# Altium PCB design3.PcbDoc
Units mil, origin at the board's own origin, x right, y up, seen from the top; angles counter-clockwise.
Board outline 866.14 x 3937.01 mil, 2 copper layers (Top Layer, Bottom Layer); 63 components, 38 nets, 188 pads, 177 vias.
Unrouted connection lines stored in the file: 1.
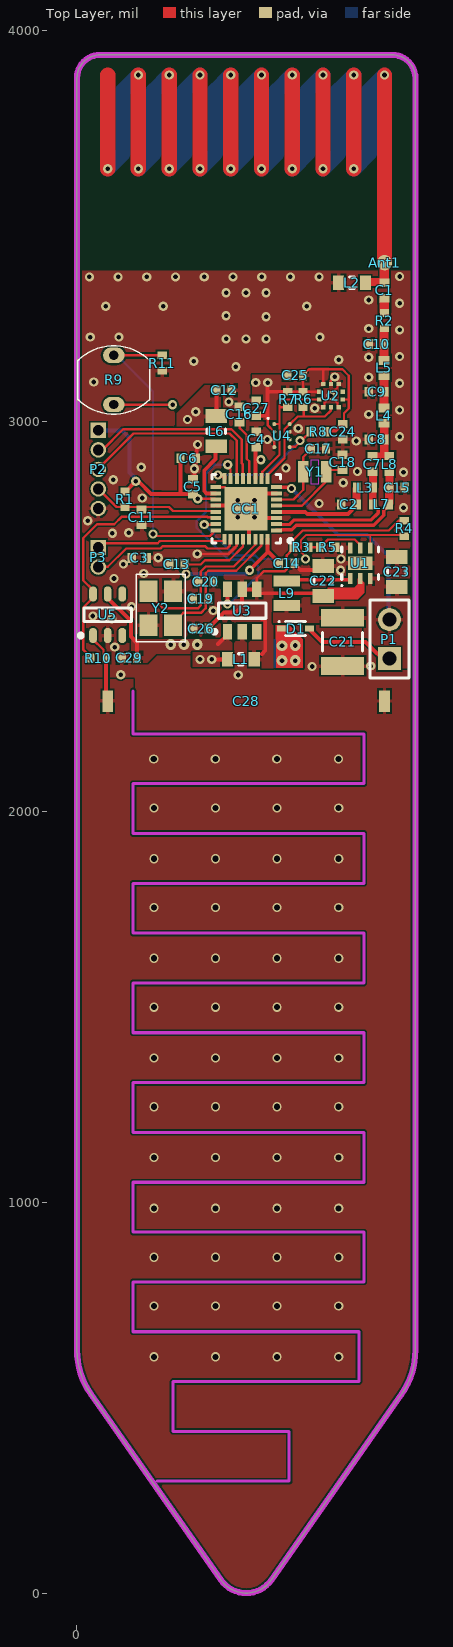
[diagram p0: Top Layer view]
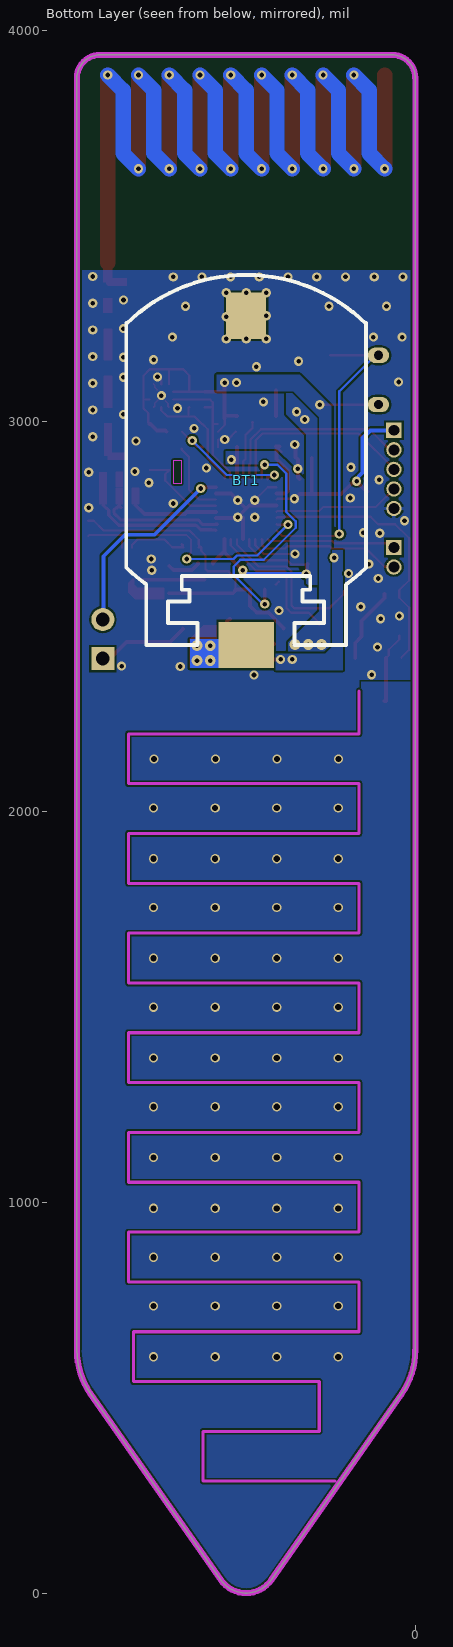
[diagram p1: Bottom Layer view, seen from below]
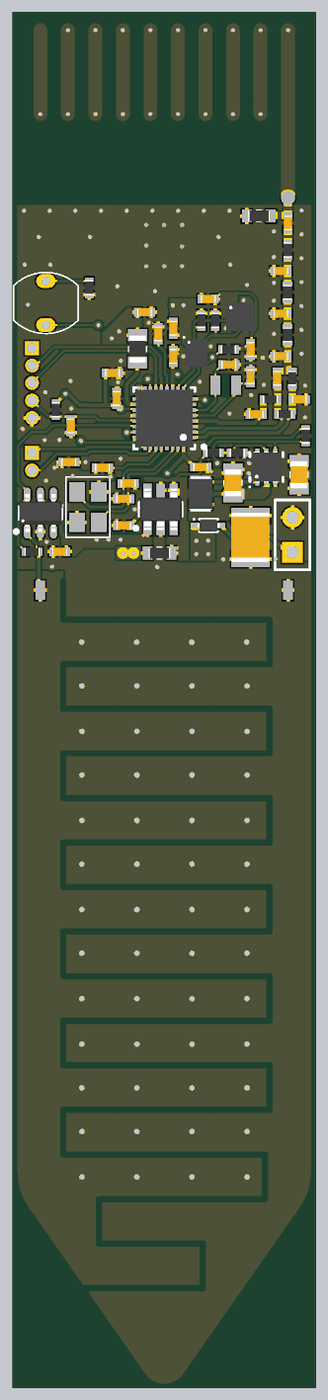
[diagram p2: 3D render of the assembled board from above, using the file's embedded part models]

## Layer stack, top to bottom
Top Solder: solder mask 0.4, Solder Resist, Dk 3.5
Top Layer: signal copper 1.4
Dielectric 1: dielectric 12.6, FR-4, Dk 4.8
Bottom Layer: signal copper 1.4
Bottom Solder: solder mask 0.4, Solder Resist, Dk 3.5

## Board outline
35.85,509.36 cw(c197.1,622.27) 0.25,622.27 0.25,3878.2 cw(c59.31,3878.2) 59.31,3937.26 807.34,3937.26 cw(c807.34,3878.2) 866.39,3878.2 866.39,622.27 cw(c669.54,622.27) 830.79,509.36 497.82,33.83 cw(c433.32,78.99) 368.82,33.83

## Design rules (kind name [scope] priority, off if disabled: settings)
Clearance [All] p1: gap=5 ignorepadtopadclearanceinfootprint=FALSE
DiffPairsRouting [All] p1: maxlimit=5 minlimit=5 mostfreqgap=5 toplayer_minwidth=8.58 toplayer_maxwidth=8.58 toplayer_prefwidth=8.58 bottomlayer_minwidth=8.58 bottomlayer_maxwidth=8.58 bottomlayer_prefwidth=8.58 maxuncoupledlength=500
Height Height_1 [InComponent('U2')] p1: minheight=0 maxheight=3937.01 prefheight=500
Height [All] p2: minheight=0 maxheight=1000 prefheight=500
HoleSize [All] p1: absolutevalues=TRUE maxlimit=100 minlimit=11.81 maxpercent=80.000 minpercent=20.000
MinimumSolderMaskSliver [All] p1: minsoldermaskwidth=5
PlaneClearance [All] p1: clearance=5
PlaneConnect [All] p1: planeconnectstyle=Direct reliefexpansion=20 reliefentries=4 reliefconductorwidth=10 reliefairgap=10
PolygonConnect [All] p1: thpad.connectstyle=Relief thpad.reliefconductorwidth=10 thpad.reliefentries=4 thpad.polygonreliefangle="90 Angle" thpad.airgapwidth=5 smdpad.connectstyle=Relief smdpad.reliefconductorwidth=10 smdpad.reliefentries=4 smdpad.polygonreliefangle="90 Angle" smdpad.airgapwidth=5 via.connectstyle=Direct via.reliefconductorwidth=10 via.reliefentries=4 via.polygonreliefangle="90 Angle" via.airgapwidth=10
RoutingVias [All] p1: holewidth=15.75 width=27.56 viastyle="Through Hole" minholewidth=11.81 minwidth=23.62 maxholewidth=19.68 maxwidth=31.5
SolderMaskExpansion [All] p1: expansion=5
Width Width_50ohm [InNet('NetAnt1_1')] p1: maxlimit=39.37 minlimit=11.55 preferedwidth=11.55 minimp=50.000000 maximp=50.000000 favimp=50.000000
Width [All] p2: maxlimit=10 minlimit=5 preferedwidth=6 minimp=50.000000 maximp=50.000000 favimp=50.000000
24 further rules are at their usual default settings.

## Classes and differential pairs
differential pair RF: +RF_P -RF_N

## Components (designator, comment, footprint, x,y, rotation, side; value= is the part's Value field where it differs from the comment)
Ant1 "Antenna 868 Helix" ANTENNA_868_HELIX 787.4,3405.51 r180 top
BT1 "Battery Coin Cell" S8421-45R 433,2488.19 r180 bottom
C1 "Cap" "0402 (CAP)" 787,3334.31 r90 top value=8.2pF
C2 "Cap" "0402 (CAP)" 696.37,2786.63 r0 top value=100pF
C3 "Cap" "0402 (CAP)" 160,2650 r0 top value=100nF
C4 "Cap" "0402 (CAP)" 459,2953 r270 top value=100nF
C5 "Cap" "0402 (CAP)" 297,2831.75 r270 top value=22uF
C6 "Cap" "0402 (CAP)" 285,2905 r180 top value=100nF
C7 "Cap" "0402 (CAP)" 756.37,2890.02 r90 top value=3.6pF
C8 "Cap" "0402 (CAP)" 767,2953 r180 top value=2.7pF
C9 "Cap" "0402 (CAP)" 767,3075 r180 top value=6.2pF
C10 "Cap" "0402 (CAP)" 767,3197 r180 top value=3pF
C11 "Cap" "0402 (CAP)" 165.67,2753.91 r270 top value=100nF
C12 "Cap" "0402 (CAP)" 377,3079 r180 top value=22uF
C13 "Cap" "0402 (CAP)" 256,2634 r0 top value=100nF
C14 "Cap" "0402 (CAP)" 537.2,2636 r180 top value=100nF
C15 "Cap" "0402 (CAP)" 819.37,2829.63 r0 top value=3.6pF
C16 "Cap" "0402 (CAP)" 416,3017 r270 top value=1uF
C17 "Cap" "0402 (CAP)" 618,2929 r180 top value=12pF
C18 "Cap" "0402 (CAP)" 680,2894.32 r270 top value=12pF
C19 "DNM" "0402 (CAP)" 317,2545 r0 top value=12pF
C20 "DNM" "0402 (CAP)" 330,2589 r180 top value=12pF
C21 "GRM32EC70J107ME15L" "1210 (CAP)" 680,2435 r90 top value=100uF
C22 "Cap" "0805 (CAP)" 630,2591 r270 top value=22uF
C23 "Cap" "0805 (CAP)" 819,2614 r270 top value=10uF
C24 "Cap" "0402 (CAP)" 680.39,2972.69 r90 top value=100nF
C25 "Cap" "0402 (CAP)" 558.97,3116.71 r0 top value=100nF
C26 "Cap" "0402 (CAP)" 317.66,2468.93 r0 top value=1uF
C27 "Cap" "0402 (CAP)" 459,3033 r270 top value=100nF
C28 "Chumidity" SOIL_CAP 433.07,669.29 r0 top locked value=1pF
C29 "Cap" "0402 (CAP)" 134.31,2394 r0 top value=100nF
CC1 "CC1310F32RSMR" CC1310F32RSMR 433.07,2775.59 r180 top
D1 "RB751S40T5G" SOD-523 560,2469 r0 top
L1 "BLM18HE152SN1D" "0603 (IND)" 419.63,2390 r180 top value="1500 Ohm"
L2 "Inductor" "0603 (IND)" 704,3354 r180 top value=68nH
L3 "Inductor" "0402 (IND)" 736.94,2829.63 r180 top value=7.5nH
L4 "Inductor" LQW15AN6N8G00D 786,3014 r270 top value=6.8nH
L5 "Inductor" LQW15AN6N8G00D 786,3136 r270 top value=6.8nH
L6 "MLZ2012N6R8LT000" "0805 (IND)" 357,2974 r90 top value=6.8uH
L7 "Inductor" "0402 (IND)" 778.37,2786.63 r0 top value=27nH
L8 "Inductor" "0402 (IND)" 799.37,2889.63 r270 top value=7.5nH
L9 "Inductor" SRN2009T 537.2,2559.35 r90 top value=3.3uH
P1 "Header 2" HDR1X2 800,2392 r90 top
P2 "Header 5" 5pin-1.27 54.96,2876.31 r270 top
P3 "Header 2" 2pin-1.27 54.96,2651.31 r270 top
R1 "Res1" "0402 (RES)" 123,2800 r90 top value=100K
R2 "DNM" "0402 (RES)" 787,3257 r270 top value=0
R3 "DNM" "0402 (RES)" 574,2677 r0 top value=0
R4 "Res1" "0402 (RES)" 837.87,2725.32 r270 top value=10K
R5 "DNM" "0402 (RES)" 642,2677 r0 top value=0
R6 "Res1" "0402 (RES)" 579,3055.32 r90 top value=4.7K
R7 "Res1" "0402 (RES)" 539.57,3055.32 r90 top value=4.7K
R8 "Res1" "0402 (RES)" 617.21,2972.69 r180 top value=4.7K
R9 "200K - 10K" Photoresistor 94.49,3105.29 r90 top
R10 "Rcharge" "0402 (RES)" 55.13,2393.55 r180 top value=1k
R11 "Res1" "0402 (RES)" 218.72,3148.6 r90 top value=4.7K
U1 "TPS61291" TPS61291 725.24,2636.13 r90 top
U2 "BMP388, Pressure sensor" BMP388 650.37,3065.16 r90 top
U3 "TPS22860" SOT23-5 423,2515 r90 top
U4 "HDC1010, Humidity, Temp" HDC1010 525,2962.84 r0 top
U5 "74LVC2G14, Inverting Schmitt Trigger" 74LVC2G14 78.74,2504.29 r90 top
Y1 "32.768 kHz" "FC-12M 32.7680KA-A3" 609,2870 r0 top
Y2 "TSX-3225 24.0000MF20G-AC3" "TSX-3225 24.0000MF20G-AC3" 214.68,2521.34 r90 top

## Footprints (in the part's own frame and the unit in brackets; to place one, negate y for a bottom-side part, rotate by r counter-clockwise, add the part's x,y. Pads: shape width x height; smd on the part's side, far side on the other; paste and mask are expansions set on the pad)
2pin-1.27 [mm]
  rect 1x1 hole 0.7: 1(-0.635,0)
  round 1 hole 0.7: 2(0.635,0)
5pin-1.27 [mm]
  rect 1x1 hole 0.7: 1(-2.54,0)
  round 1 hole 0.7: 2(-1.27,0) 3(0,0) 4(1.27,0) 5(2.54,0)
74LVC2G14 [mm] "TSOP, 6-Leads, Body 2,90x1,50mm, Pitch 0,95mm, IPC Medium Density"
  oval 1x0.5 smd: 1(-1.35,0.95) 2(-1.35,0) 3(-1.35,-0.95) 4(1.35,-0.95) 5(1.35,0) 6(1.35,0.95)
  silkscreen extent -1.47,-1.55 0.45,1.87, body extent -1.38,-1.55 1.38,1.55, height 1.1
"0402 (CAP)" [mm] "Chip Capacitor, 2-Leads, Body 1,60x0,80mm, IPC Medium Density"
  rect 0.54x0.64 smd: 1(-0.5,0) 2(0.5,0)
  body extent -0.55,-0.3 0.55,0.3, height 0.4
"0402 (IND)" [mm] "Chip Inductor, 2-Leads, Body 1,00x0,50mm, IPC Medium Density"
  rect 0.51x0.64 smd: 1(-0.525,0) 2(0.525,0)
  body extent -0.55,-0.3 0.55,0.3, height 0.4
"0402 (RES)" [mm] "Chip Resistor, 2-Leads, Body 1,00x0,50mm, IPC Medium Density"
  rect 0.5x0.6 smd: 1(-0.5,0) 2(0.5,0)
  body extent -0.55,-0.3 0.55,0.3, height 0.4
"0603 (IND)" [mm]
  rect 0.72x0.94 smd: 1(-0.87,0) 2(0.87,0)
  silkscreen extent -0.15,-0.37 0.15,0.37, body extent -0.8,-0.4 0.8,0.4, height 0.6
"0805 (CAP)" [mm] "Chip Capacitor, 2-Leads, Body 2,00x1,25mm, IPC Medium Density"
  rect 0.9x1.4 smd: 1(-0.975,0) 2(0.975,0)
  silkscreen extent -0.15,-0.6 0.15,0.6, body extent -1,-0.63 1,0.63, height 0.6
"0805 (IND)" [mm] "Chip Inductor, 2-Leads, Body 2,00x1,25mm, IPC Medium Density"
  rect 0.9x1.39 smd: 1(-0.98,0) 2(0.98,0)
  silkscreen extent -0.15,-0.6 0.15,0.6, body extent -1,-0.63 1,0.63, height 0.6
"1210 (CAP)" [mm] "Chip Capacitor, 2-Leads, Body 3,20x2,50mm, IPC Medium Density"
  rect 1.15x2.8 smd: 1(-1.575,0) 2(1.575,0)
  silkscreen extent -0.6,-1.3 0.6,1.3, body extent -1.8,-1.4 1.8,1.4, height 2.8
ANTENNA_868_HELIX [mm]
  round 1 smd: 1(0,0)
  Top Layer lines w1: 18,-6.1 18,-12.2 ; 16,-6.1 16,-12.2 ; 14,-6.1 14,-12.2 ; 12,-6.1 12,-12.2 ; 10,-6.1 10,-12.2 ; 8,-6.1 8,-12.2 ; 6,-6.1 6,-12.2 ; 4,-6.1 4,-12.2 ; 2,-6.1 2,-12.2 ; 0,0 0,-12.2
  Bottom Layer lines w1: 18,-6.1 17,-7.1 17,-11.2 16,-12.2 ; 16,-6.1 15,-7.1 15,-11.2 14,-12.2 ; 14,-6.1 13,-7.1 13,-11.2 12,-12.2 ; 12,-6.1 11,-7.1 11,-11.2 10,-12.2 ; 10,-6.1 9,-7.1 9,-11.2 8,-12.2 ; 8,-6.1 7,-7.1 7,-11.2 6,-12.2 ; 6,-6.1 5,-7.1 5,-11.2 4,-12.2 ; 4,-6.1 3,-7.1 3,-11.2 2,-12.2 ; 2,-6.1 1,-7.1 1,-11.2 0,-12.2
BMP388 [mm] "LGA, 10-Leads, Body 2,00x2,00mmx0,80mm, Pitch 0,50mm"
  rect 0.275x0.275 smd: 1(0.25,0.762) 2(-0.25,0.762) 3(-0.75,0.5) 4(-0.75,0) 5(-0.75,-0.5) 6(-0.25,-0.763) 7(0.25,-0.763) 8(0.75,-0.5) 9(0.75,0) 10(0.75,0.5)
  body extent -1.02,-1.03 1.65,1.02, height 30
CC1310F32RSMR [mm] "QFN, 32-Leads, Body 4,00x4,00mm, Pitch 0,40mm, Thermal Pad 2,80x2,80mm, IPC Medium Density"
  rect 0.7x0.26 smd: 1(-1.975,1.4) 2(-1.975,1) 3(-1.975,0.6) 4(-1.975,0.2) 5(-1.975,-0.2) 6(-1.975,-0.6) 7(-1.975,-1) 8(-1.975,-1.4) 17(1.975,-1.4) 18(1.975,-1) 19(1.975,-0.6) 20(1.975,-0.2) 21(1.975,0.2) 22(1.975,0.6) 23(1.975,1) 24(1.975,1.4)
  rect 0.26x0.7 smd: 9(-1.4,-1.975) 10(-1,-1.975) 11(-0.6,-1.975) 12(-0.2,-1.975) 13(0.2,-1.975) 14(0.6,-1.975) 15(1,-1.975) 16(1.4,-1.975) 25(1.4,1.975) 26(1,1.975) 27(0.6,1.975) 28(0.2,1.975) 29(-0.2,1.975) 30(-0.6,1.975) 31(-1,1.975) 32(-1.4,1.975)
  rect 2.8x2.8 smd: 33(0,0)
  silkscreen extent -3,-2.22 2.22,2.22, body extent -2.08,-2.08 2.08,2.08, height 1
"FC-12M 32.7680KA-A3" [mm]
  rect 0.7x1.4 smd: 1(-0.75,0) 2(0.75,0)
  Keep-Out Layer region: -0.254,-0.762 0.254,-0.762 0.254,0.762 -0.254,0.762
HDC1010 [mm] "BGA, 8-Leads, Body 1,59x2,04mmx0,68mm, Pitch 0,50mm"
  round 0.26 smd: A1(-0.5,0.75) A2(0.5,0.75) B1(-0.5,0.25) B2(0.5,0.25) C1(-0.5,-0.25) C2(0.5,-0.25) D1(-0.5,-0.75) D2(0.5,-0.75)
  silkscreen extent -0.95,1.08 -0.85,1.17, body extent -0.79,-1.02 0.79,1.02, height 0.67
HDR1X2 [mm] "Connector; Header; 2 Position"
  rect 1.5x1.5 hole 0.9: 1(0,0)
  round 1.5 hole 0.9: 2(2.54,0)
  silkscreen extent -1.27,-1.27 3.81,1.27
LQW15AN6N8G00D [mm] "Chip Inductor, 2-Leads, Body 1,00x0,60mm, IPC Medium Density"
  rect 0.58x0.74 smd: 1(-0.49,0) 2(0.49,0)
  body extent -0.55,-0.35 0.55,0.35, height 0.5
Photoresistor [mm]
  oval 1x1.4 hole 0.6: 1(-1.6,0) 2(1.6,0)
  silkscreen extent -2.22,-2.35 2.22,2.35
S8421-45R [mm]
  rect 3.6x3 smd: 1(0,-1.556)
  rect 2.6x3 smd: 2(0,19.844)
  silkscreen extent -7.8,-1.56 7.8,22.5
SOD-523 [mm] "Molded Diode, 2-Leads, Body 1,20x0,80mm, IPC Medium Density"
  rect 0.6x0.4 smd: 1(-0.9,0) 2(0.9,0)
  silkscreen extent -1.12,-0.45 0.65,0.5, body extent -0.87,-0.45 0.87,0.45, height 0.7
SOIL_CAP [mm]
  rect 0.7x1.4 smd: 1(-9,41) 2(9,41)
  Keep-Out Layer lines w0.2: -7.339,41.656 -7.339,38.867 7.661,38.867 7.661,35.628 -7.339,35.628 -7.339,32.389 7.661,32.389 7.661,29.15 -7.339,29.15 -7.339,25.911 7.661,25.911 7.661,22.672 -7.339,22.672 -7.339,19.434 7.661,19.434 7.661,16.195 -7.339,16.195 -7.339,12.956 7.661,12.956 7.661,9.717 -7.339,9.717 -7.339,6.478 7.661,6.478 7.661,3.239 -7.339,3.239 -7.339,0 7.339,0 7.339,-3.239 -4.749,-3.239 -4.749,-6.478 2.803,-6.478 2.803,-9.717 -5.777,-9.717
SOT23-5 [mm] "SOT23, 5-Leads, Body 2,90x2,80mm, Pitch 0,95mm, IPC Medium Density"
  rect 1x0.6 smd: 1(-1.375,0.95) 2(-1.375,0) 3(-1.375,-0.95) 4(1.375,-0.95) 5(1.375,0) 6(1.375,0.95)
  silkscreen extent -1.5,-1.55 0.5,1.92, body extent -1.5,-1.53 1.5,1.53, height 1.45
SRN2009T [mm] "Molded Inductor, 2-Leads, Body 2,00x1,60mm, IPC Medium Density"
  rect 0.7x1.7 smd: 1(-0.8,0) 2(0.8,0)
  body extent -1.32,-0.9 1.32,0.9, height 0.95
TPS61291 [mm] "SON, 6-Leads, Body 2,00x2,00mm, Pitch 0,65mm, Thermal Pad 1,60x0,89mm, IPC Medium Density"
  rect 0.7x0.3 smd: 1(-0.995,0.65) 2(-0.995,0) 3(-0.995,-0.65) 4(0.995,-0.65) 5(0.995,0) 6(0.995,0.65)
  rect 0.89x1.6 smd: 7(0,0)
  silkscreen extent -1.5,-1.2 1.05,1.25, body extent -1.13,-1.05 1.13,1.05, height 0.8
"TSX-3225 24.0000MF20G-AC3" [mm]
  rect 1.4x1.15 smd: 1(-1.1,-0.8) 2(1.1,-0.8) 3(1.1,0.8) 4(-1.1,0.8)
  silkscreen extent -2.2,-1.6 2.2,1.6

## Part data
C1 C2 C3 C4 C5 C6 C7 C8 C9 C10 C11 C12 C13 C14 C15 C16 C17 C18 C22 C23 C24 C25 C26 C27 C29: "Capacitor", LatestRevisionDate=17-Jul-2002, LatestRevisionNote="Re-released for DXP Platform.", PackageDescription="Radial Cap, Thru-Hole; 2 Leads; 0.3 in Pin Spacing", PackageReference=RAD-0.3, Published=8-Jun-2000, Publisher="Altium Limited"
C19 C20 C21 C28: library part Cap, "Capacitor", LatestRevisionDate=17-Jul-2002, LatestRevisionNote="Re-released for DXP Platform.", PackageDescription="Radial Cap, Thru-Hole; 2 Leads; 0.3 in Pin Spacing", PackageReference=RAD-0.3, Published=8-Jun-2000, Publisher="Altium Limited"
D1: library part "D Schottky", "Schottky Diode", Code_JEDEC=DO-214-AA, LatestRevisionDate=17-Jul-2002, LatestRevisionNote="Re-released for DXP Platform.", PackageDescription="DO-214-AA/SMB; 2 C-Bend Leads; Body 5.3 x 3.6 mm, inc. leads (LxW)", PackageReference=SMB, Published=8-Jun-2000, Publisher="Altium Limited"
L1: library part "Inductor Iron", "Magnetic-Core Inductor", LatestRevisionDate=17-Jul-2002, LatestRevisionNote="Re-released for DXP Platform.", PackageDescription="Axial Device, Thru-Hole; 2 Leads; 0.9 in Pin Spacing", PackageReference=AXIAL-0.9, Published=24-Mar-1999, Publisher="Altium Limited"
L6: library part Inductor, "Inductor", Code_IEC=1005, Code_JEITA=0402, LatestRevisionDate=29-May-2009, LatestRevisionNote="IPC-7351 Footprint Added.", PackageDescription="Chip Inductor", PackageReference=0402-A, Published=8-Jun-2000, Publisher="Altium Limited"
P1 P3: "Header, 2-Pin", LatestRevisionDate=17-Jul-2002, LatestRevisionNote="Re-released for DXP Platform.", Publisher="Altium Limited"
P2: "Header, 5-Pin", LatestRevisionDate=17-Jul-2002, LatestRevisionNote="Re-released for DXP Platform.", Publisher="Altium Limited"
R1 R4 R6 R7 R8 R11: "Resistor", LatestRevisionDate=17-Jul-2002, LatestRevisionNote="Re-released for DXP Platform.", PackageDescription="Axial Device, Thru-Hole; 2 Leads; 0.3 in Pin Spacing", PackageReference=AXIAL-0.3, Published=8-Jun-2000, Publisher="Altium Limited"
R2 R3 R5 R10: library part Res1, "Resistor", LatestRevisionDate=17-Jul-2002, LatestRevisionNote="Re-released for DXP Platform.", PackageDescription="Axial Device, Thru-Hole; 2 Leads; 0.3 in Pin Spacing", PackageReference=AXIAL-0.3, Published=8-Jun-2000, Publisher="Altium Limited"
R9: library part "Photo Resistor"
U2: library part BMP388
U4: library part HDC1010
U5: library part 74LVC2G14
Y1: library part XTAL, "Crystal Oscillator", LatestRevisionDate=17-Jul-2002, LatestRevisionNote="Re-released for DXP Platform.", PackageDescription="Crystal, Thru-Hole; 2 Leads; Body 3.1 x 8.2 mm (Dia.xH)", PackageReference=R38, Published=8-Jun-2000, Publisher="Altium Limited"
Y2: library part Crystal
L2 L3 L4 L5 L7 L8 L9: Code_IEC=1005, Code_JEITA=0402, LatestRevisionDate=29-May-2009, LatestRevisionNote="IPC-7351 Footprint Added.", PackageDescription="Chip Inductor", PackageReference=0402-A, Published=8-Jun-2000, Publisher="Altium Limited"

## Via types
v1: diameter 23.62, hole 11.81, Top Layer to Bottom Layer, tented both sides, 112 vias
v2: diameter 23.62, hole 15.75, Top Layer to Bottom Layer, tented both sides, 52 vias
v3: diameter 27.56, hole 11.81, Top Layer to Bottom Layer, tented both sides, 7 vias
v4: diameter 23.62, hole 11.81, Top Layer to Bottom Layer, 6 vias

## Nets (pads, with @x,y where several pads share a name; then routed paths per layer and width w, separated by ;. In a path a pad name is that pad's centre, name@x,y a point inside that pad or via, vN(x,y) a via of type N, cw(c..) or ccw(c..) an arc to the next point about the centre after c; other vN are vias at no path point)
BMP_INT: U2.7
DCDC_SW: CC1.18 L6.1 | length 192
  Top Layer w6: L6.1@342.35,2920.76 352.18,2930.59 L6.1
  Top Layer w10: CC1.18 355.2,2815.08 331.86,2815.08 326,2820.94 326,2873.4 355.2,2902.6 355.2,2927.57 352.18,2930.59 347.35,2935.42 L6.1
DRDYn: CC1.16 R8.2 U4.D2 | length 343.6
  Top Layer w6: U4.D2 545.5,2934.13 558.97,2934.13 v1@574.84,2950 ; v1(571,2950) v1@574.84,2950 ; R8.2 v1@574.84,2950
  Top Layer w10: v1(360.92,2862) 363.52,2859.4 377.83,2859.4 377.95,2859.28 CC1.16
  Bottom Layer w6: v1(360.92,2862) 483,2862 v1(571,2950)
EN_BYP: CC1.23 R4.2 U1.4 | length 684
  Top Layer w5: v1(585,2647) 585,2653 574,2664 574,2696 587,2709 750.76,2709 ; U1.4 750.83,2708.93 750.76,2709 ; R4.2 834.5,2709 750.76,2709
  Top Layer w6: v1(326,2735) 352.09,2735 353.09,2734 CC1.23
  Bottom Layer w6: v1(326,2735) 405,2656 456.32,2656 465.32,2647 v1(585,2647)
GND: BT1.2 C2.1 C3.1 C4.1 C5.1 C6.1 C8.2 C9.2 C10.2 C11.2 C12.1 C13.1 C14.1 C15.2 C16.1 C17.1 C18.1 C19.1 C20.1 C21.1 C22.1 C23.1 C24.1 C25.1 C26.1 C27.1 C28.2 C29.1 CC1.3 CC1.7 CC1.17 CC1.20 CC1.29 CC1.33 L2.2 P2.5 R5.2 R11.1 U1.6 U1.7 U2.3 U2.5 U2.8 U2.9 U3.2 U4.B2 U4.C1 U4.D1 U5.2 Y2.2 Y2.4 | length 741.9
  Top Layer w5: U2.3 633.6,3038.54 633.6,3045.6 640,3052 ; v1@656,3057 667.15,3045.85 667.15,3038.54 U2.5 ; 661,3080 667.15,3086.15 667.15,3091.77 U2.8
  Top Layer w6: C20.1 C20.1@356.98,2581.71 ; CC1.17 355.46,2830.57 378.09,2830.57 v4(411.42,2797.24) ; C4.1 460.31,2972.68 480,2953 v1(487.67,2953) U4.C1 U4.D1 ; U2.9 650.04,3095.02 650.04,3103 v1(660,3113)
  Top Layer w10: C5.1 300.84,2855.27 v1(300.84,2878.22) 300.84,2901.16 C6.1 306.84,2907.16 306.84,2941.84 v1@307,2942 ; CC1.20 425.2,2783.46 CC1.33 ; CC1.29 CC1.33@440.94,2753.94 ; CC1.3 456.69,2751.97 v4(454.72,2753.94) CC1.33 ; CC1.7 472.44,2814.96 v4(454.72,2797.24) CC1.33 ; C14.1 556.89,2634.03 571.92,2619 619.61,2619 C22.1
  other v1: 413,2350 112,2351 602,2372 752,2373 96.96,2421.61 89,2494 41,2501 349,2515 140,2525 95,2597 171,2610 675,2618 119,2634 676,2647 91,2713 133,2714 28,2745 836,2778 620,2789 167,2803 682,2842 93,2850 836,2869 718,2871 535,2880 165,2882 309,2940 715,2949 826,2960 566.34,2981.21 747,3017 826,3028.33 609,3033 389,3049 650.06,3065.16 826,3096.67 43,3100 747,3112 407,3139 299,3153 670,3157 747,3163.5 826,3165 381.82,3210.39 432.96,3210.39 484.18,3210.39 34,3215 107.5,3215 622,3215 826,3233.33 747,3236.75 484.18,3266.84 381.82,3269.45 74,3294 221,3294 588.5,3294 826,3301.67 747,3310 381.82,3328.5 432.96,3328.5 484.18,3328.5 32,3369 105.5,3369 179,3369 252.5,3369 326,3369 399.5,3369 473,3369 546.5,3369 620,3369 826,3370
  other v2: 197.56,735 355.04,735 512.52,735 670,735 197.56,985 355.04,985 512.52,985 670,985 197.56,1245 355.04,1245 512.52,1245 670,1245 197.56,1500 355.04,1500 512.52,1500 670,1500 197.56,1755 355.04,1755 512.52,1755 670,1755 197.56,2010 355.04,2010 512.52,2010 670,2010
  other v4: 411.42,2753.94
JTAG_TCK: CC1.14 P2.3 | length 497.6
  Top Layer w6: P2.3 56.82,2878.17 56.82,2879.82 145.25,2968.25 390.94,2968.25 409.03,2950.16 409.03,2853.77 CC1.14
JTAG_TMS: CC1.13 P2.2 | length 500.7
  Top Layer w6: P2.2 65.31,2926.31 118.25,2979.25 395.49,2979.25 422,2952.75 422,2892.42 424.83,2889.59 424.83,2853.72 CC1.13
NetAnt1_1: Ant1.1 C1.2 L2.1 | length 0.6
  Top Layer w11.55: C1.2 C1.2@787.2,3354.2 ; Ant1.1@787.2,3405.31 Ant1.1
  other v1: 78.74,3645.67 157.48,3645.67 236.22,3645.67 314.96,3645.67 393.7,3645.67 472.44,3645.67 551.18,3645.67 629.92,3645.67 708.66,3645.67 157.48,3885.83 236.22,3885.83 314.96,3885.83 393.7,3885.83 472.44,3885.83 551.18,3885.83 629.92,3885.83 708.66,3885.83 787.4,3885.83
NetBT1_1: BT1.1 D1.1 | length 43.3
  Top Layer w10: 539.57,2425.69 539.57,2469
  other v3: 525,2387 558.97,2387 525,2425 558.97,2425.66
NetC1_1: C1.1 R2.1
NetC2_2: C2.2 CC1.4 L3.2 | length 219
  Top Layer w10: CC1.4 584.28,2767.72 590,2762 693.39,2762 716.05,2784.66 C2.2
NetC7_2: C7.2 C8.1 L4.2 L8.1
NetC9_1: C9.1 L4.1 L5.2
NetC10_1: C10.1 L5.1 R2.2
NetC16_2: C16.2 CC1.12 | length 156.3
  Top Layer w6: C16.2 417.97,2997.31 417,2996.35 417,2982 435,2964 435,2903 440.94,2897.06 CC1.12
NetC17_2: C17.2 CC1.6 Y1.1 | length 191.4
  Top Layer w6: CC1.6 554.21,2799.21 579.47,2824.47 Y1.1 579.47,2908.19 598.31,2927.03 C17.2
NetC18_2: C18.2 CC1.5 Y1.2 | length 237.4
  Top Layer w6: CC1.5 575.86,2783.46 640,2847.61 640,2864.32 629.69,2874.63 C18.2
NetC19_2: C19.2 CC1.31 Y2.1 | length 382.3
  Top Layer w6: Y2.1 246.18,2482.95 272.22,2509 317.66,2509 330,2521.34 330,2611 336,2617 408,2617 472.44,2681.44 CC1.31
NetC20_2: C20.2 CC1.30 Y2.3 | length 428.1
  Top Layer w6: Y2.3 183.18,2557.82 219.66,2521.34 310.48,2521.34 317,2527.86 317,2615 330,2628 401.32,2628 456.69,2683.37 CC1.30
NetC28_1: C28.1 R10.1 U5.1 | length 185.5
  Top Layer w6: U5.1 41.34,2441.3 67.98,2414.66 67.98,2400.39 R10.1
  Top Layer w10: R10.1 74.82,2283.46 C28.1
  other v2: 197.56,605 355.04,605 512.52,605 670,605 197.56,860 355.04,860 512.52,860 670,860 197.56,1115 355.04,1115 512.52,1115 670,1115 197.56,1370 355.04,1370 512.52,1370 670,1370 197.56,1625 355.04,1625 512.52,1625 670,1625 197.56,1880 355.04,1880 512.52,1880 670,1880 196.85,2135 354.33,2135 511.81,2135 669.29,2135
NetCC1_24: CC1.24 R9.2 R11.2 | length 796.3
  Top Layer w6: R9.2 R11.2 ; v1(194.69,2711) 199.69,2706 340.84,2706 CC1.24
  Bottom Layer w6: R9.2 102.36,3168.28 194.69,3075.96 v1(194.69,2711)
NetD1_2: D1.2 P1.1 | length 245.9
  Top Layer w10: D1.2 594.42,2467.99 627.62,2434.79 739.21,2434.79 P1.1@800,2374
NetL9_2: L9.2 U1.1 | length 158.5
  Top Layer w10: L9.2@540.26,2593.9 U1.1@698.74,2593.9
NetR3_2: R3.2 R5.1 U1.5 | length 159.9
  Top Layer w6: R3.2 R5.1 642.39,2697.08 711.33,2697.08 725.24,2683.17 U1.5 ; R3.2@593.69,2683 597.72,2683 R3.2@597.72,2685.37
PWR_ON: CC1.15 U3.6 | length 621
  Top Layer w6: v1(386,2888) 386,2883.23 393.11,2876.13 393.11,2853.94 CC1.15
  Top Layer w10: v1(385.6,2531.51) U3.6
  Bottom Layer w6: v1(385.6,2531.51) 390.51,2531.51 465,2606 465,2628 448,2645 387.98,2645 306.19,2726.79 306.19,2743.21 330.49,2767.5 330.49,2865.49 353,2888 v1(386,2888)
RESET_N: C11.1 CC1.21 P2.4 R1.1 | length 324.6
  Top Layer w6: P2.4 101.27,2780 130,2780 165.67,2780 235.79,2780 245.95,2769.83 353.2,2769.83 CC1.21
RF_N: C7.1 CC1.2 L3.1 L7.1 | length 306.8
  Top Layer w8.58: CC1.2@507.33,2736.18 CC1.2@508.12,2735.39 ; CC1.2 511.65,2735.39 521.97,2735.39 522.23,2735.14 543.93,2735.14 555.79,2747 753.84,2747 771.58,2764.74 771.58,2772.75 766.01,2778.32 763.45,2778.32 757.7,2784.07 L7.1 ; L7.1@752.08,2778.69 L7.1@755.18,2778.69
RF_P: C15.1 CC1.1 L7.2 L8.2 | length 324.5
  Top Layer w8.58: CC1.1 511.65,2721.3 521.97,2721.3 522.23,2721.56 549.56,2721.56 561.42,2733.42 759.46,2733.42 785.16,2759.12 785.16,2771.68 790.19,2776.71 791.68,2776.71 799.04,2784.07 L7.2
SCL: CC1.10 R7.1 U2.2 U4.A1 | length 353.2
  Top Layer w6: CC1.10 474.56,2855.46 474.56,2869.93 518.43,2913.8 518.43,2992.37 ; U4.A1 518.43,2992.37 ; R7.1 518.43,3035.63 ; U2.2 525.32,3055.32 518.43,3048.43 518.43,3035.63 ; 518.43,2992.37 518.43,3035.63
SDA: CC1.9 R6.1 U2.4 U4.A2 | length 314.7
  Top Layer w6: CC1.9 488.19,2862.01 531.57,2905.39 531.57,2979.25 U4.A2 545.83,2992.37 565.12,3011.66 634.61,3011.66 650.37,3027.42 U2.4 ; R6.1 580.67,3033.96 580.67,3012.49
SOIL_HUMIDITY: CC1.22 R10.2 U5.6 | length 699.1
  Top Layer w6: R10.2 35.45,2395.52 15.87,2415.09 15.87,2522.13 41.34,2547.59 U5.6 41.34,2567.28 15.87,2592.74 15.87,2700.13 51.85,2736.1 95.55,2736.1 114.26,2754.81 334.21,2754.81 335.1,2753.91 353.37,2753.91 CC1.22
UART_RX: CC1.26 P3.2 | length 379.5
  Top Layer w6: P3.2@57,2627 79.11,2627 126.11,2674 214,2674 220,2680 328,2680 334,2674 384.33,2674 391.58,2681.25 391.58,2695.72 CC1.26
UART_TX: CC1.25 P3.1 | length 331.9
  Top Layer w6: P3.1 65.72,2687.07 207.07,2687.07 213,2693 373.12,2693 CC1.25
V_switch: C24.2 C25.2 C27.2 C29.2 R6.2 R7.2 R8.1 R9.1 U2.1 U2.6 U2.10 U3.1 U4.B1 U5.5 | length 1094.7
  Top Layer w6: R9.1 94.64,3042.15 244.85,3042.15 v1(245,3042) ; 488.19,3006.52 488.19,2989.81 U4.B1 ; R7.2 R6.2 ; U2.1 R6.2 ; U2.10 630.69,3133 ; C24.2 683.47,2995.45 683.47,3020 696,3032.53 696,3055.56 ; U2.6 695.75,3055.32 696,3055.56 ; R6.2 578.65,3075.35 C25.2 594.94,3133 630.69,3133 ; 630.69,3133 679,3133 696,3116 696,3055.56
  Top Layer w10: U5.5 78.74,2547.59 138,2488.34 138,2448.5 154,2432.5 C29.2 ; 361.61,2429 385.6,2452.99 U3.1 ; C27.2@456.69,3013.61 488.17,3013.61 ; C27.2@457.03,3013.31 C27.2 ; 488.19,3006.52 488.19,3075.5 ; v1(488.39,3098.58) 488.19,3098.38 488.19,3075.5 ; R7.2 488.69,3075 488.19,3075.5 ; R8.1 639.9,2975.69 661.74,2975.69 678.43,2992.37 C24.2
  other v1: 458,3098.58
  other v3: 240,2428 274,2428 308,2428
Vbat: C21.2 C23.2 CC1.8 L9.1 P1.2 U1.3 | length 521.2
  Top Layer w10: CC1.8 542.48,2830.71 545.7,2827.48 v1@547.38,2827.48
  Bottom Layer w10: v1(549.39,2827.48) 667.87,2709 743,2709 798,2654 798,2494 P1.2
VCC: C22.2 C26.2 L1.1 R3.1 R4.1 U1.2 U3.4 U3.5 | length 971.5
  Top Layer w6: U3.4 460.4,2597.82 477.98,2615.4 531.46,2615.4 537.4,2621.34 537.4,2656.39 548.32,2667.3 R3.1@548.32,2677 ; R3.1 R3.1@548.32,2677 ; R3.1@554.32,2683 R3.1@548.32,2677 ; R3.1@554.32,2684.97 554.32,2696.32 578,2720 798,2720 823,2745 R4.1
  Top Layer w10: C26.2 337.35,2470.9 376.14,2509.7 407.41,2509.7 407.41,2512 407.8,2512 423,2527.2 U3.5 457.43,2569.13 U3.4@460.4,2566.17 ; U3.4 U3.4@460.4,2566.17 ; 473.66,2404.16 482.21,2412.71 482.21,2487.68 476.35,2493.54 474.03,2493.54 ; C22.2@630.44,2559.35 467.21,2559.35 U3.4@460.4,2566.17
VDDR: C12.2 C13.2 C14.2 CC1.28 CC1.32 L6.2 | length 588.5
  Top Layer w6: C13.2@276.69,2633 317,2633 328,2644 390,2644 425.2,2679.2 CC1.28
  Top Layer w10: C13.2 276.69,2633 277.55,2632.13 277.55,2610.47 v1(279.42,2608.61) ; L6.2 C12.2@356.98,3079 ; v1(442.11,2618.11) 488.19,2664.19 488.19,2667.3 ; CC1.32 488.19,2667.3 ; C14.2 517.52,2637.97 488.19,2667.3
  Bottom Layer w10: v1(279.42,2608.61) 432.61,2608.61 v1(442.11,2618.11)
  other v1: 283,3004 304,3024
VDDS: C3.2 C4.2 C5.2 C6.2 CC1.11 CC1.19 CC1.27 L1.2 P2.1 R1.2 | length 804.5
  Top Layer w6: C5.2 298.97,2812.06 v1(309.6,2801.43) 353.1,2801.43 CC1.19 ; v1(308,2660) 388,2660 409.45,2681.45 CC1.27
  Top Layer w10: P2.1 P2.1@55.59,2975.69 ; R1.2 124.97,2819.69 150.48,2845.2 v1(150.48,2845.95) ; v1@157.48,2845.95 189.68,2813.75 213,2813.75 213.84,2812.91 264.59,2812.91 ; C6.2 265.31,2813.63 264.59,2812.91 ; C5.2 296.16,2812.91 264.59,2812.91 ; v4(345,2390) L1.2 ; CC1.11 C4.2@456.69,2933.31
  Bottom Layer w10: P2.1 115.34,2976.31 135.02,2956.63 135.02,2868.41 v1@157.48,2845.95
  other v1: 208,2650 471,2901
  other v4: 315,2390
pads on no net: U3.3 U4.C2 U5.3 U5.4

## Polygon pours and split planes (outlines as drawn)
VDDS on Top Layer "Top Layer-VDDS 1" (solid, pour order 2): 296,2408.5 296,2371.5 389.1,2371.5 389.1,2408.5
VDDS on Top Layer "Top Layer-VDDS" (solid, pour order 6): 420,2690 420,2628.65 184.06,2628.65 184.06,2690
no net on Top Layer "Top Layer-No Net 2" (solid, pour order 48): 320,2680
V_switch on Top Layer "Top Layer-V_switch 1" (solid, pour order 10): 644,3136.39 594.94,3136.39 576.55,3118 449.11,3118 449.11,3003 644,3003
VDDR on Top Layer "Top Layer-VDDR" (solid, pour order 34): 327.6,3091.6 256,3020 256,2979.25 368.82,2979.25 368.82,3091.6
V_switch on Top Layer "Top Layer-V_switch" (solid, pour order 26): 203.12,2405 179.52,2381.4 139,2381.4 139,2441.74 397.72,2441.74 397.72,2405
VCC on Top Layer "Top Layer-VCC" (solid, pour order 24): 439.81,2368 439.81,2443.74 376.14,2507.4 376.14,2607 503,2607 503,2368
no net on Top Layer "Top Layer-No Net 1" (solid, pour order 22): 511.65,2449
GND on Top Layer "Top Layer-GND 1" (solid, pour order 20): 863.39,2711 580.67,2711 580.67,2596.95 863.39,2596.95
Vbat on Top Layer "Top Layer-Vbat" (solid, pour order 16): 734.53,2368 734.53,2483.32 503,2483.32 503,2559.35 692.75,2559.35 735.39,2602 863.39,2602 863.39,2368
GND on Top Layer "Top Layer-No Net" (solid, pour order 38): 0,3385 866.39,3385 866.39,2338 0,2338
GND on Top Layer "Top Layer-GND" (solid, pour order 14): 734.69,2071.98 734.69,2199.49 144,2199.49 144,2345 866.39,2345 866.39,622.27 846.6,536.25 484.05,18.77 433.07,0.25 368.82,33.83 191.73,286.74 543.43,286.74 543.43,414.26 246.1,414.26 246.1,541.77 722.01,541.77 722.01,669.29 144.13,669.29 144.13,796.81 734.69,796.81 734.69,924.33 144.13,924.33 144.13,1051.84 734.69,1051.84 734.69,1179.36 144.13,1179.36 144.13,1306.88 734.69,1306.88 734.69,1434.39 144.13,1434.39 144.13,1561.91 734.69,1561.91 734.69,1689.43 144.13,1689.43 144.13,1816.94 734.69,1816.94 734.69,1944.46 144.13,1944.46 144.13,2071.98
NetC28_1 on Top Layer "Top Layer-NetC28_1" (solid, pour order 12): 144.13,2199.49 734.69,2199.49 734.69,2070.41 144.13,2070.41 144.13,1944.46 734.69,1944.46 734.69,1816.94 144.13,1816.94 144.13,1689.43 734.69,1689.43 734.69,1561.91 144.13,1561.91 144.13,1434.39 734.69,1434.39 734.69,1306.88 144.13,1306.88 144.13,1179.36 734.69,1179.36 734.69,1051.84 144.13,1051.84 144.13,924.33 734.69,924.33 734.69,796.81 144.13,796.81 144.13,669.29 722.01,669.29 722.01,541.77 246.1,541.77 246.1,414.26 543.43,414.26 543.43,286.74 205.62,286.74 0,574 0,2339 144.13,2339
VDDS on Bottom Layer "Bottom Layer-VDDS 1" (solid, pour order 4): 359,2362.87 359,2405 231,2405 213,2423 213,2669.68 186.52,2669.68 186.52,2362.87
NetC28_1 on Bottom Layer "Top Layer-NetC28_1" (solid, pour order 46): 144.13,2199.49 734.69,2199.49 734.69,2070.41 144.13,2070.41 144.13,1944.46 734.69,1944.46 734.69,1816.94 144.13,1816.94 144.13,1689.43 734.69,1689.43 734.69,1561.91 144.13,1561.91 144.13,1434.39 734.69,1434.39 734.69,1306.88 144.13,1306.88 144.13,1179.36 734.69,1179.36 734.69,1051.84 144.13,1051.84 144.13,924.33 734.69,924.33 734.69,796.81 144.13,796.81 144.13,669.29 722.01,669.29 722.01,541.77 246.1,541.77 246.1,414.26 543.43,414.26 543.43,286.74 205.62,286.74 0,574 0,2339 144.13,2339
GND on Bottom Layer "Top Layer-GND" (solid, pour order 44): 734.69,2071.98 734.69,2199.49 144,2199.49 144,2345 866.39,2345 866.39,622.27 846.6,536.25 484.05,18.77 433.07,0.25 368.82,33.83 191.73,286.74 543.43,286.74 543.43,414.26 246.1,414.26 246.1,541.77 722.01,541.77 722.01,669.29 144.13,669.29 144.13,796.81 734.69,796.81 734.69,924.33 144.13,924.33 144.13,1051.84 734.69,1051.84 734.69,1179.36 144.13,1179.36 144.13,1306.88 734.69,1306.88 734.69,1434.39 144.13,1434.39 144.13,1561.91 734.69,1561.91 734.69,1689.43 144.13,1689.43 144.13,1816.94 734.69,1816.94 734.69,1944.46 144.13,1944.46 144.13,2071.98
GND on Bottom Layer "Top Layer-No Net" (solid, pour order 42): -0.25,3385.53 866.14,3385.53 866.14,2338 -0.25,2338
VDDS on Bottom Layer "Bottom Layer-VDDS" (solid, pour order 40): 386,2889.82 386,2887.69 321,2822.69 321,2629.95 279.42,2629.95 279.42,2845.42 357,2923 485,2923 485,2889.82
VDDR on Bottom Layer "Bottom Layer-VDDR" (solid, pour order 36): 330.15,3016.98 330.15,3076.67 312.67,3076.67 291.56,3055.56 241,3005 241,2580.68 279.42,2580.68 279.42,2966.25
no net on Bottom Layer "Bottom Layer-No Net" (solid, pour order 32): 206,2289
V_switch on Bottom Layer "Bottom Layer-V_switch" (solid, pour order 28): 246,3010 312.67,3076.67 509,3076.67 509,3119 296,3119 215,3038 215,2706 215,2425 232,2408 325,2408 325,2434 246,2513

## Keep-outs
Keep-Out Layer:
  lines w15.75: 0,624 0,3879.94 ; 0.25,622.27 ccw(c197.1,622.27) 35.85,509.36 368.82,33.83 ccw(c433.32,78.99) 497.82,33.83 830.79,509.36 ccw(c669.54,622.27) 866.39,622.27 866.39,3878.2 ccw(c807.34,3878.2) 807.34,3937.26 ; 0.25,3878.2 cw(c59.31,3878.2) 59.31,3937.26 ; 59.31,3937.26 807.34,3937.26 ; 59.31,3937.26 59.31,3937.26 ; 807.34,3937.26 807.34,3937.26

## Other copper
Top Layer:
  rectangle net NetBT1_1: 509,2368 578.65,2441.74
  rectangle net NetAnt1_1: 775.12,3354.2 799,3402.99
  rectangle net NetC2_2: 706,2787 726,2830
  rectangle net RF_N: 748,2786 767,2829
  rectangle net RF_N: 748,2830 768,2870.71
  rectangle net RF_P: 789,2786 810,2829
  rectangle net RF_P: 789.24,2829 810,2869.71
  rectangle net NetC7_2: 745,2901 788,2920
  rectangle net NetC7_2: 776,2910.67 797,2953
  rectangle net NetC7_2: 776,2953 797,2994.71
  rectangle net NetC9_1: 775.12,3033.29 797.76,3075
  rectangle net NetC9_1: 775.12,3075 797.76,3116.71
  rectangle net NetC10_1: 775.12,3155.29 797.76,3197
  rectangle net NetC10_1: 775.12,3197 797.76,3237.31
  rectangle net NetC1_1: 775.12,3276.68 799,3314.63
  rectangle net NetAnt1_1: 738.25,3346 787.4,3366.34
  region net NetBT1_1: 543.39,2477 509,2477 509,2441.74 578.65,2441.74
  region net VCC: 725.24,2596.95 719.39,2596.95 719.39,2583 710.39,2574 642.39,2574 642.39,2544 718.39,2544 735.39,2561 735.39,2586.8
Bottom Layer:
  rectangle net NetBT1_1: 503,2368 577,2441.74

## Silkscreen, mask and mechanical layers (free items; w line width, h text height)
Mechanical 1:
  the board outline again, w0.5